# Altium PCB 388D_Control_v1_PCB1.PcbDoc (part 2 of 7)
Units mil, origin at the board's own origin, x right, y up, seen from the top; angles counter-clockwise.
Board outline 3431 x 3800 mil, 6 copper layers (Top Layer, Singal Layer 2, Signal layer 3, Signal Layer 4, Signal Layer 5, Bottom Layer), stack 32.7 mil thick; 270 components, 383 nets, 1462 pads, 899 vias.
Unrouted connection lines stored in the file: 19.
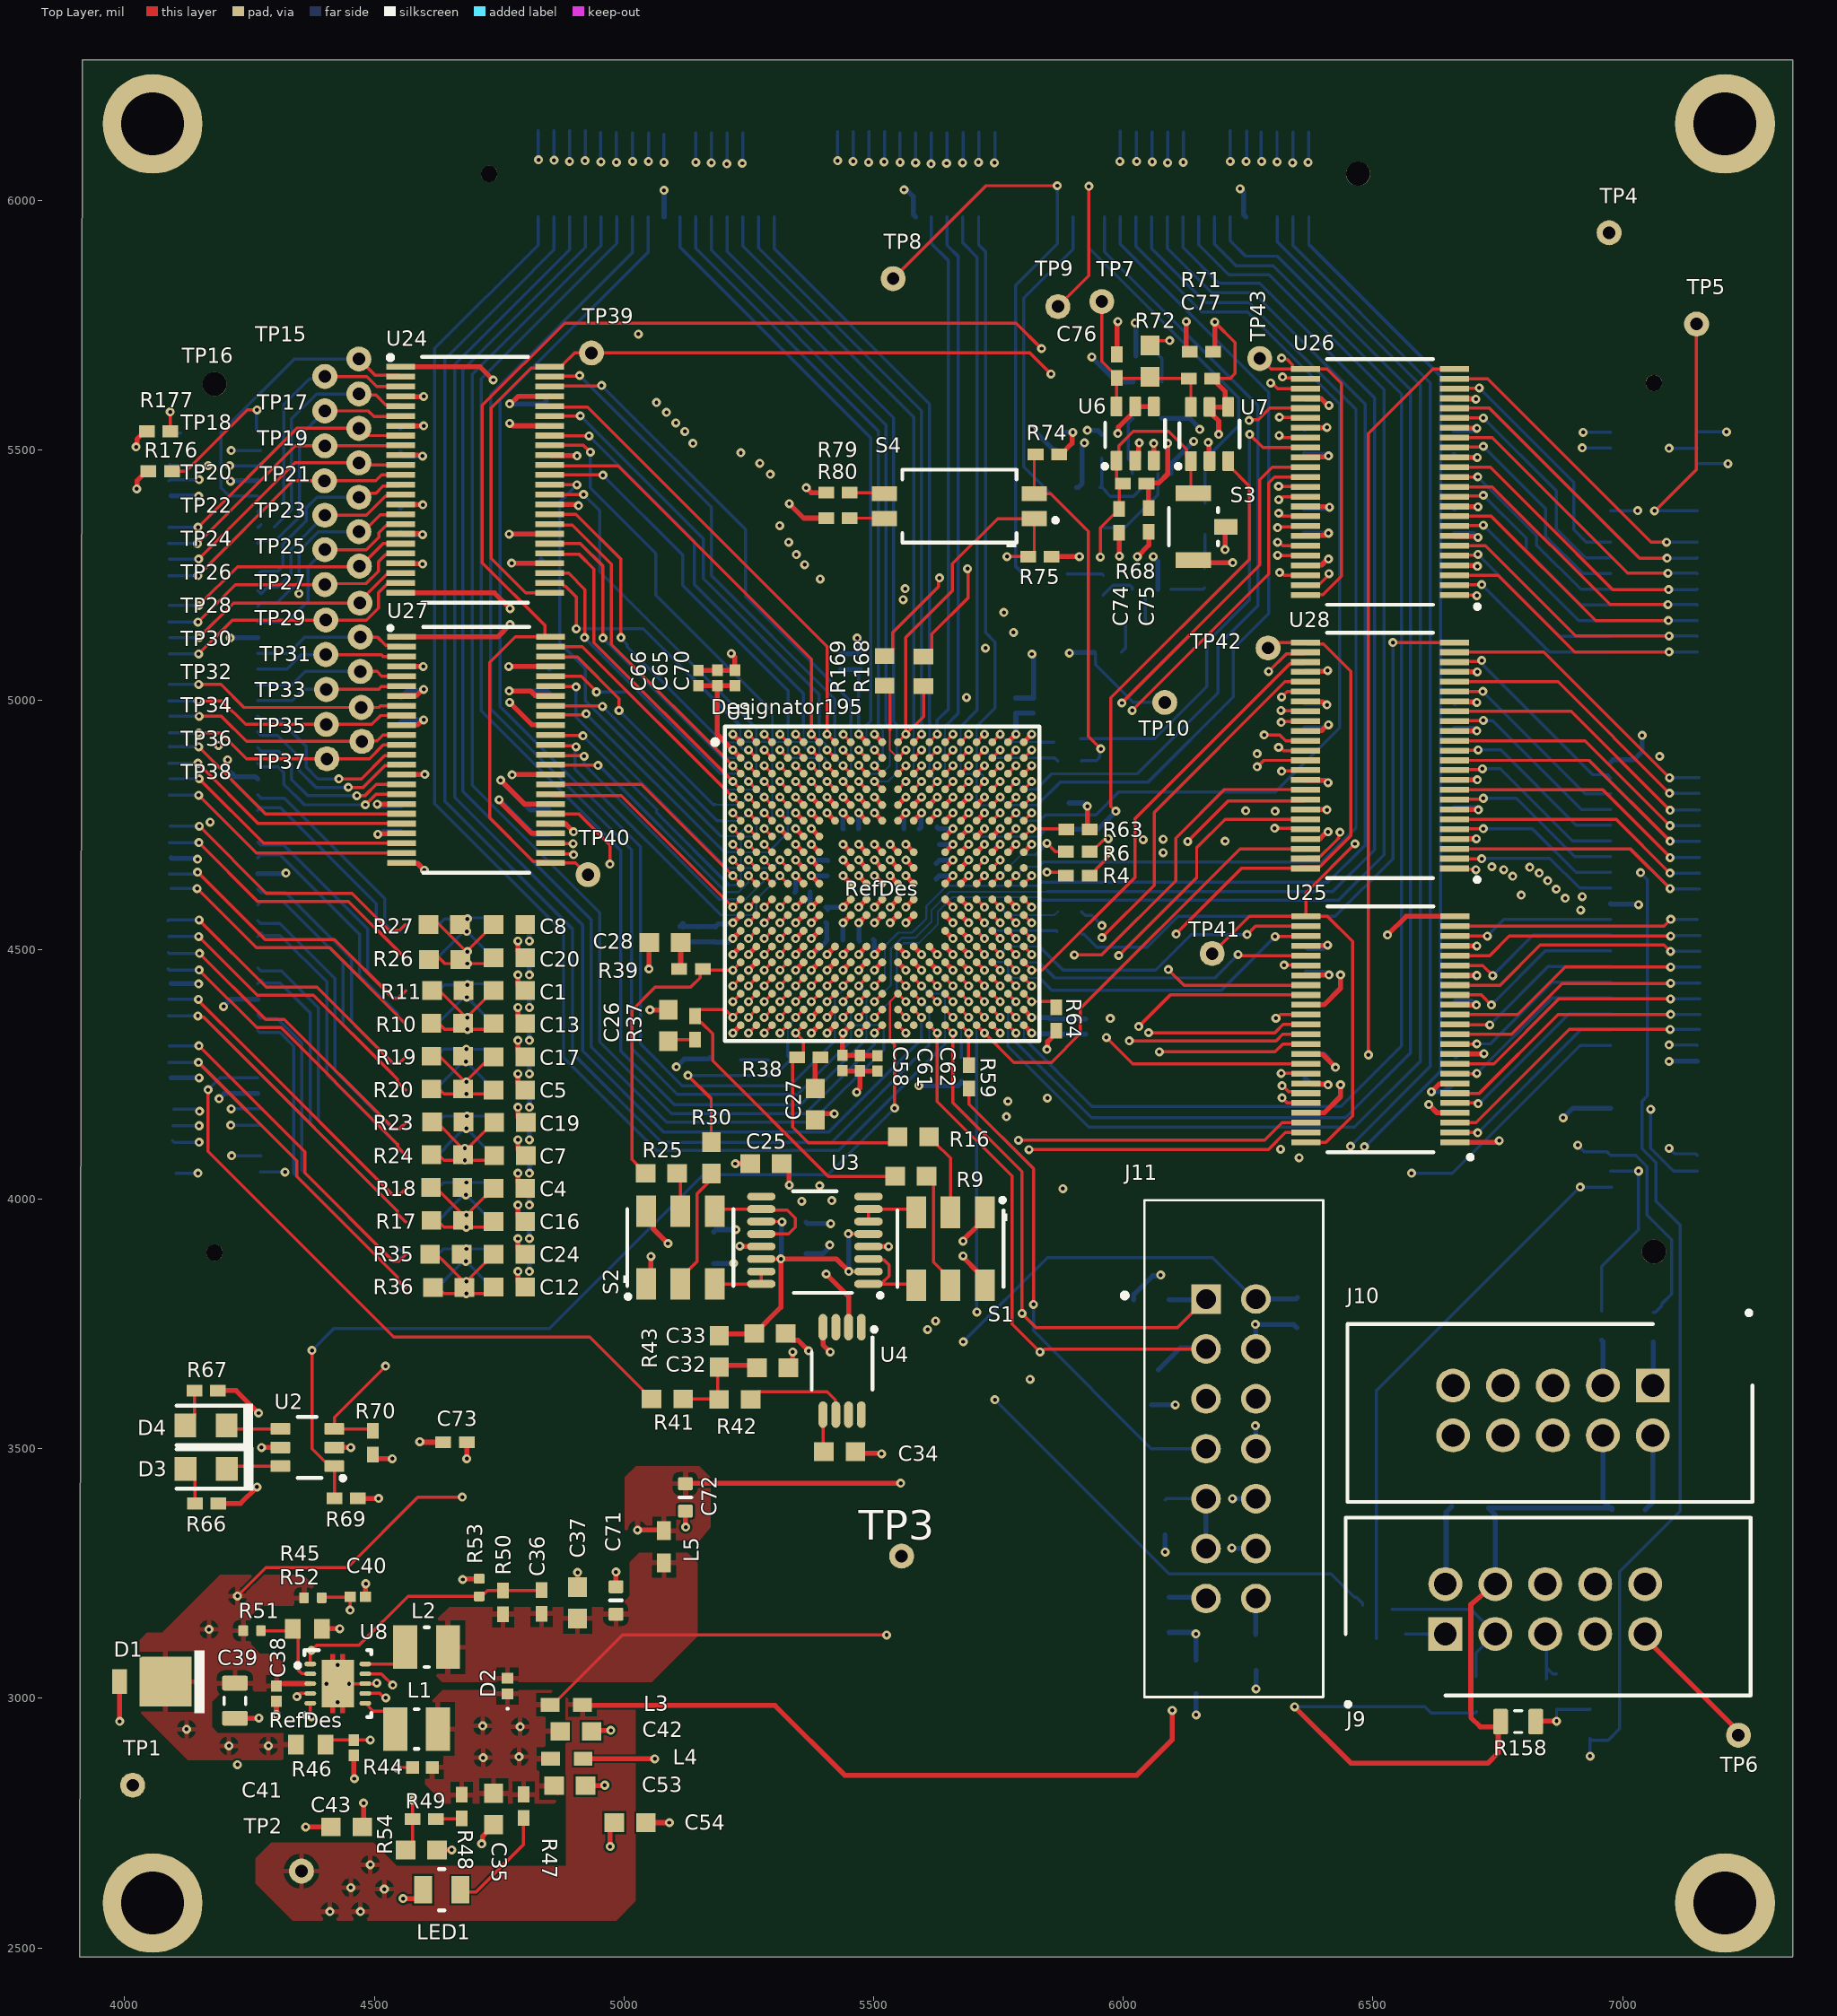
[diagram p0: Top Layer view]

## Part data (continued)
D2: library part CMP-004-00069-1, "SURFACE MOUNT SILICON LOW VF SCHOTTKY DIODE 0.5 AMP", Arrow Part Number="CFSH05-20L TR PBFREE", Manufacturer_Name="Central Semiconductor", Mouser Part Number=610-CFSH05-20LTR, Arrow Price/Stock=https://www.arrow.com/en/products/cfsh05-20ltrpbfree/central-semiconductor?region=nac, Datasheet Link=https://my.centralsemi.com/get_document.php?cmp=1&mergetype=pd&mergepath=pd&pdf_id=CFSH05-20L.PDF, Design Item ID=CFSH05-20L_TR_PBFREE, Height=0.4mm, Manufacturer_Part_Number="CFSH05-20L TR PBFREE", Mouser Price/Stock=https://www.mouser.co.uk/ProductDetail/Central-Semiconductor/CFSH05-20L-TR-PBFREE?qs=u16ybLDytRbLc8US0gUlgw%3D%3D, Source=SamacSys.SchLib
D3 D4: library part CMP-0002951-3, "LED, Red, SMD", Color=Red, Manufacturer="Wurth Elektronik", Power_TotalModule=72mW, Value1=0.072W, Value2=1.9V, Angle=140, ComponentLink1Description="Datasheet link", ComponentLink1URL=http://katalog.we-online.de/led/datasheet/150080SS75000.pdf, CompType=LED, Io_A=30mA, Ir_A=25μA, MountType=SMT, PackageReference=LED_0805, PartNumber=150080SS75000, RoHS=Y, TJmax_C=85°C, Type=AlInGaP, Vf_V=1.9V, Vr_V=5V
J1 J2 J12: library part CMP-002-00178-1, "Socket(male) 100 Positions, Dual Row, Vertical Receptacle. BergStak Lite 0.80mm, Board-to-Board Connector,", Case/Package=None, Check_prices=https://www.snapeda.com/parts/10144517-101802LF/Amphenol/view-part/?ref=eda, Design Item ID=10144517-101802LF, MF="AMPHENOL ICC / FCI", MP=10144517-101802LF, SnapEDA_Link=https://www.snapeda.com/parts/10144517-101802LF/Amphenol/view-part/?ref=snap, Source=SamacSys.SchLib
J9 J10: library part CMP-002-00158-1, "10 Positions Header Connector 0.100\" (2.54mm) Through Hole Gold", Arrow Part Number=302-S101, Manufacturer_Name="On Shore Technology Inc.", Arrow Price/Stock=https://www.arrow.com/en/products/302-s101/on-shore-technology?utm_currency=USD&region=nac, Datasheet Link=https://www.digikey.com/product-detail/en/on-shore-technology-inc/302-S101/ED1543-ND/2178422, Design Item ID=302-S101, Height=9.05mm, Manufacturer_Part_Number=302-S101, Source=SamacSys.SchLib
J11: library part CMP-002-00182-1, "Connector Header Through Hole 14 position 0.100 (2.54mm)", Case/Package=None, Check_prices=https://www.snapeda.com/parts/SBH11-PBPC-D07-ST-BK/Sullins/view-part/?ref=eda, Design Item ID=SBH11-PBPC-D07-ST-BK, MF="Sullins Connector", MP=SBH11-PBPC-D07-ST-BK, SnapEDA_Link=https://www.snapeda.com/parts/SBH11-PBPC-D07-ST-BK/Sullins/view-part/?ref=snap, Source=SBH11-PBPC-D07-ST-BK.SchLib
L1 L2: library part CMP-006-00009-6, "Chip Inductor, 2.2 uH, +/- 20%, -55 to 125 degC, 1008 (2520 Metric), RoHS, Tape and Reel", Case/Package=1008, Current Rating=1.3A, Manufacturer=Murata, Max Operating Temperature=125°C, Min Operating Temperature=-55°C, Package Description="2-Pin Surface Mounted Device, Body 2.5 x 2 mm", Package Quantity=3000, Self Resonant Frequency=40MHz, Tolerance=20%, Core Material=Ferrite, Datasheet URL=http://psearch.en.murata.com/inductor/product/LQM2HPN2R2MG0%23.pdf, Datasheet Version=Aug-16, Mounting Technology=SM, Package Reference=1008, Packaging=TapeandReel, RoHS Compliant=True, Shielding=Shielded